# EAGLE board LurkerNanov10 (EAGLE 6.4)
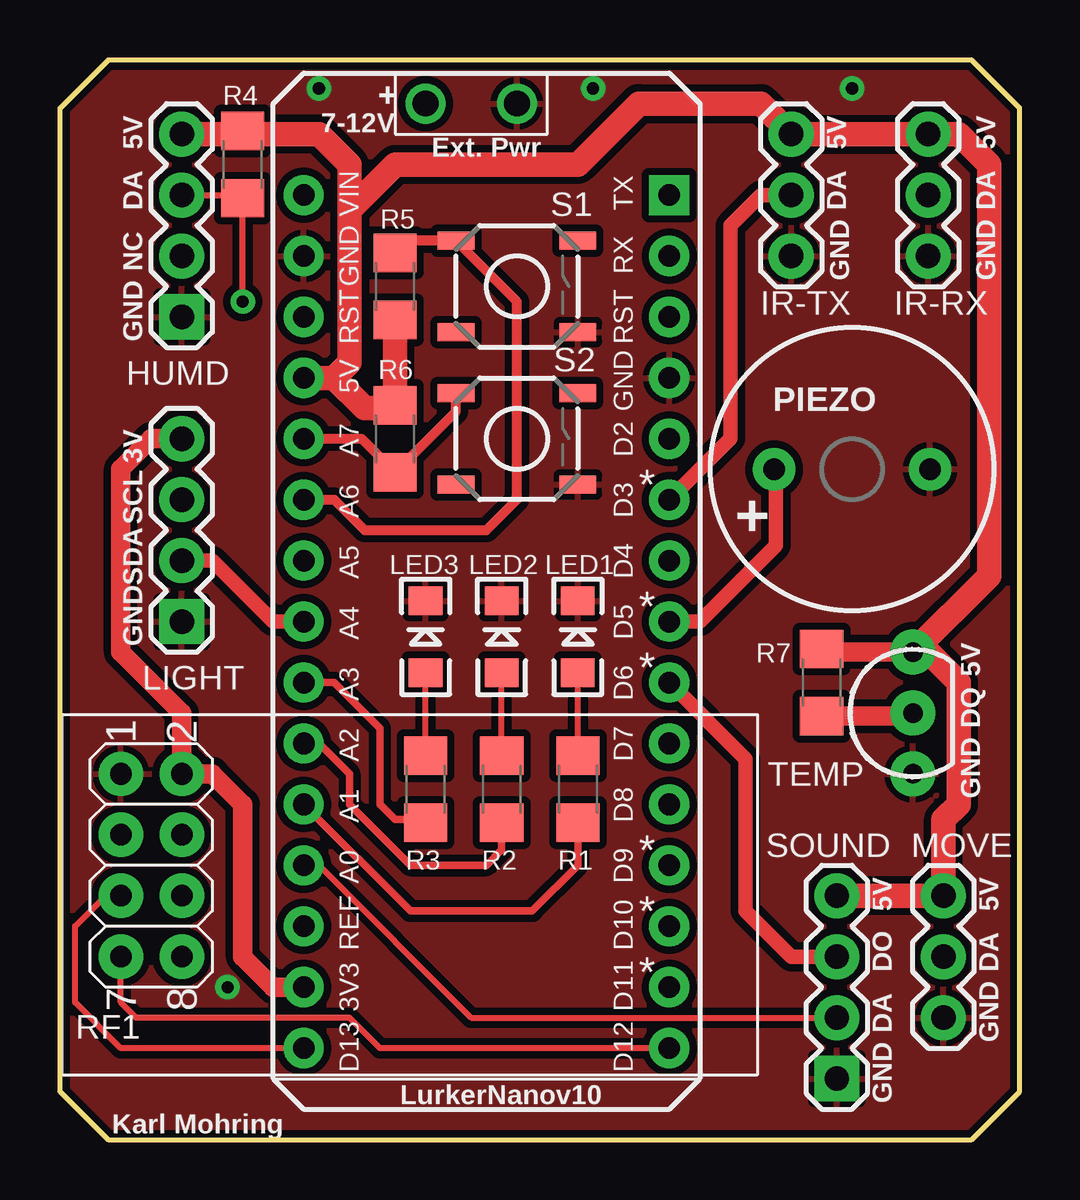
[diagram p0: board, top side]
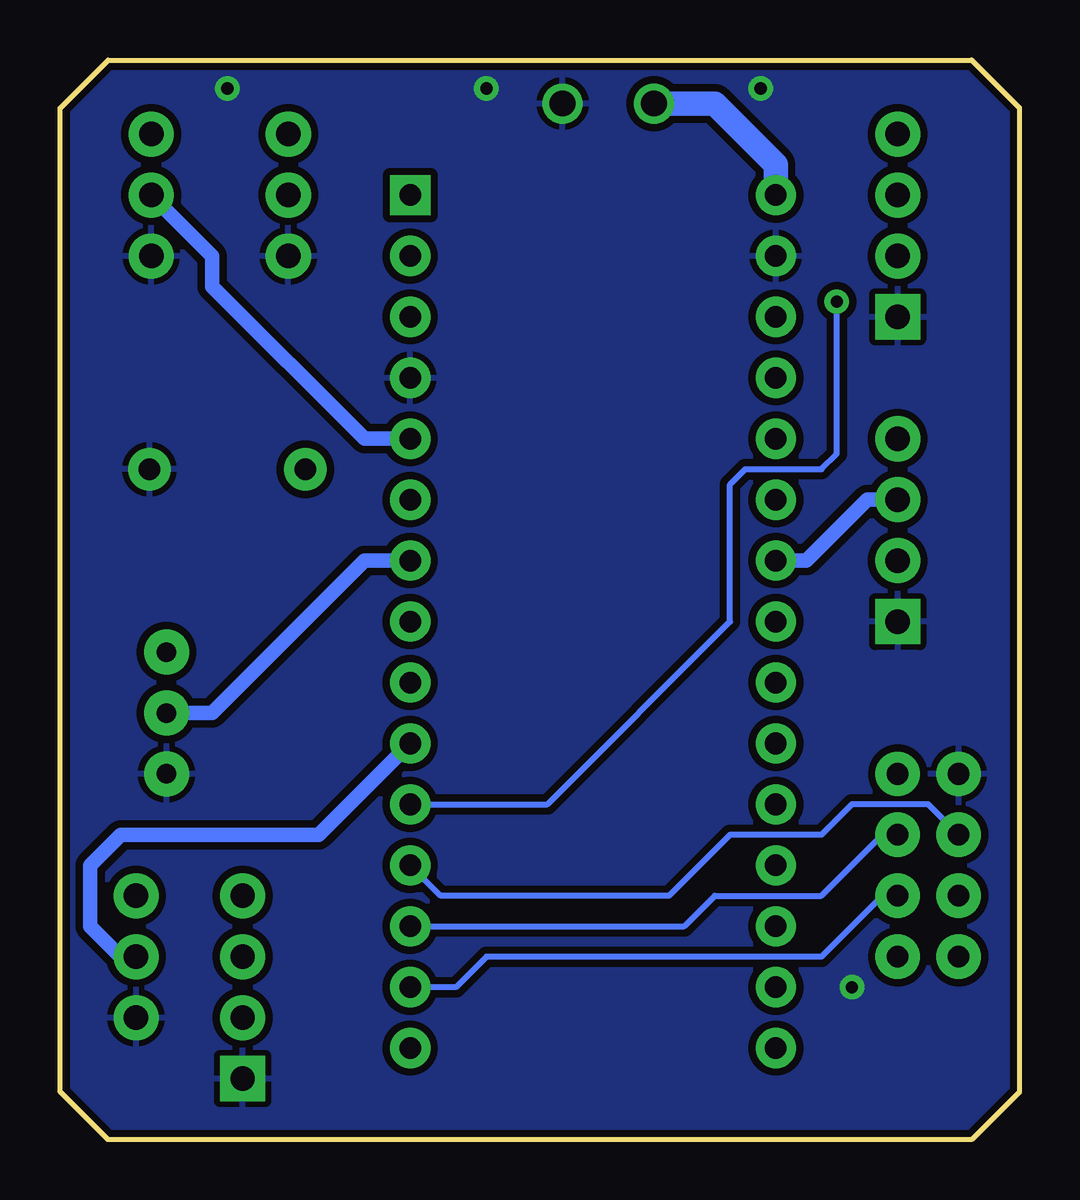
[diagram p1: board, bottom side, seen from below]

Size 40 x 45 mm. Coordinates in mm from the lower left corner, seen from the top.
Outline: 2,0 38,0 40,2 40,43 38,45 2,45 0,43 0,2 2,0
Copper layers (1*16): Top 0.035mm / dielectric 1.5mm / Bottom 0.035mm
Design rules "SparkFun": minimum track width 8mil, minimum drill 20mil, track to track 8mil, track to pad 8mil, pad to pad 8mil, via to via 8mil, smd to smd 8mil, copper to edge 10mil, drill to drill 8mil, minimum pad ring 12mil, minimum via ring 10mil, stop-mask expansion 4mil, vias tented up to drill 25mil, thermal gap 10mil

## Footprints (pad centres in the part's own frame; a part is rotated, then mirrored left to right if it is on the bottom)
1X02_BIG = drill 1.067: P$1 0,0; P$2 3.81,0
1X04 = drill 1.016 pad 1.88 square: 1 0,0 | drill 1.016 pad 1.88: 2 2.54,0; 3 5.08,0; 4 7.62,0
1X03 = drill 1.016 pad 1.88: 1 0,0; 2 2.54,0; 3 5.08,0
LED-1206 = smd 1.2 x 1.4: A -1.5,0; C 1.5,0
1206 = smd 1.6 x 1.8: 1 -1.4,0; 2 1.4,0
NRF24L01+-HEADER = drill 0.9 pad 1.85: 1 -2.54,-2.54; 2 -2.54,0; 3 0,-2.54; 4 0,0; 5 2.54,-2.54; 6 2.54,0; 7 5.08,-2.54; 8 5.08,0
TACTILE_SWITCH_SMD = smd 1.524 x 0.762: 1 -2.54,1.905; 2 2.54,1.905; 3 -2.54,-1.905; 4 2.54,-1.905
BUZZER-12MM = drill 0.9 pad 1.778: + 3.25,0; - -3.25,0
TO-92-AMMO = drill 0.813 pad 1.88: 1 -2.54,0; 2 0,0; 3 2.54,0
NANO-SHIELD = drill 0.9 pad 1.676: 3V3 0,2.54; 5V 0,27.94; A0 0,7.62; A1 0,10.16; A2 0,12.7; A3 0,15.24; A4 0,17.78; A5 0,20.32; A6 0,22.86; A7 0,25.4; D2 15.24,25.4; D3 15.24,22.86; D4 15.24,20.32; D5 15.24,17.78; D6 15.24,15.24; D7 15.24,12.7; D8 15.24,10.16; D9 15.24,7.62; D10 15.24,5.08; D11 15.24,2.54; D12 15.24,0; D13 0,0; GND@0 15.24,27.94; GND@1 0,33.02; REF 0,5.08; RST 0,30.48; RST@0 15.24,30.48; RX 15.24,33.02; VIN 0,35.56 | drill 0.9 pad 1.676 square: TX 15.24,35.56

## Placement (x,y rotation side)
BATTERY  [1X02_BIG]  19.05,43.18 180 top
HUMD  DHT22  [1X04]  5.08,34.29 90 top
IR-RX  [1X03]  36.2,36.83 90 top
IR-TX  [1X03]  30.48,36.83 90 top
LED1  [LED-1206]  21.59,20.95 90 top
LED2  [LED-1206]  18.41,20.95 90 top
LED3  [LED-1206]  15.24,20.95 90 top
LIGHT  BH1750FVI  [1X04]  5.08,21.59 90 top
MOVE  PIR (HC-SR501)  [1X03]  36.83,5.08 90 top
R1  390R  [1206]  21.59,14.61 90 top
R2  390R  [1206]  18.41,14.61 90 top
R3  390R  [1206]  15.24,14.61 90 top
R4  4K7  [1206]  7.62,40.64 90 top
R5  22K  [1206]  13.97,35.56 270 top
R6  22K  [1206]  13.97,29.21 90 top
R7  4K7  [1206]  31.75,19.05 90 top
RF1  NRF24L01+  [NRF24L01+-HEADER]  5.08,12.7 270 top
S1  TACT  [TACTILE_SWITCH_SMD]  19.05,35.56 0 top
S2  TACT  [TACTILE_SWITCH_SMD]  19.05,29.21 0 top
SG1  BUZZERPTH  [BUZZER-12MM]  33.02,27.94 0 top
SOUND  MIC  [1X04]  32.38,2.54 90 top
TEMP  DS18B20  [TO-92-AMMO]  35.56,17.78 90 top
U1  ARDUINO-NANO  [NANO-SHIELD]  10.16,3.81 0 top

## Library data of the parts
BATTERY HUMD IR-RX IR-TX LIGHT MOVE SOUND = SparkFun-Connectors
LED1-LED3 = SparkFun-LED
R1-R7 = SparkFun-Resistors
RF1 TEMP U1 = Leenix
S1 S2 = SparkFun-Electromechanical; PROD_ID: SWCH-08247
SG1 = SparkFun-Electromechanical

## Nets
+3V3: LIGHT.4 RF1.2 U1.3V3
+5V: HUMD.4 IR-RX.3 IR-TX.3 MOVE.3 R4.2 R5.2 R6.2 R7.2 SOUND.4 TEMP.3 U1.5V
BTN1: R5.1 S1.1 U1.A6
BTN2: R6.1 S2.1 U1.A7
BUZZER: SG1.- U1.D5
CE: RF1.3 U1.D9
CSN: RF1.4 U1.D10
GND: BATTERY.P$1 HUMD.1 IR-RX.1 IR-TX.1 LED1.C LED2.C LED3.C LIGHT.1 MOVE.1 RF1.1 S1.4 S2.4 SG1.+ SOUND.1 TEMP.1 U1.GND@0 U1.GND@1
HUMD-DQ: HUMD.3 R4.1 U1.D8
IR-RECV: IR-RX.2 U1.D2
IR-SEND: IR-TX.2 U1.D3
LED1: R1.1 U1.A1
LED2: R2.1 U1.A2
LED3: R3.1 U1.A3
MIC-AO: SOUND.2 U1.A0
MIC-DO: SOUND.3 U1.D6
MISO: RF1.7 U1.D12
MOSI: RF1.6 U1.D11
N$1: LED1.A R1.2
N$2: LED2.A R2.2
N$3: LED3.A R3.2
PIR: MOVE.2 U1.D7
SCK: RF1.5 U1.D13
SCL: LIGHT.3 U1.A5
SDA: LIGHT.2 U1.A4
TEMP-DQ: R7.1 TEMP.2 U1.D4
V+: BATTERY.P$2 U1.VIN

## Tracks (layer width: path | path; a pad name or v marks a point on that pad's centre or on a via)
+3V3
  Top 0.813: U1.3V3 8.89,6.35 7.62,7.62 7.62,13.97 6.35,15.24 RF1.2 5.08,17.78 2.54,20.32 2.54,27.94 3.81,29.21 LIGHT.4
+5V
  Top 0.61: 6.48,41.91 R4.2 6.22,41.91
  Top 0.813: TEMP.3 31.88,20.32 R7.2
  Top 1.016: 6.48,41.91 10.79,41.91 12.06,40.64 12.06,38.73 | HUMD.4 6.22,41.91 | SOUND.4 MOVE.3 36.83,13.34 37.47,13.97 37.47,19.05 36.2,20.32 TEMP.3 38.73,23.5 38.73,40.64 37.47,41.91 IR-RX.3 IR-TX.3 29.21,43.18 24.13,43.18 21.59,40.64 13.97,40.64 12.06,38.73 | U1.5V 11.43,31.75 | 11.43,31.75 12.7,30.48 13.84,30.48 R6.2 R5.2 | 12.06,38.73 12.06,32.38 11.43,31.75
BTN1
  Top 0.406: R5.1 14.47,37.47 S1.1 19.05,34.92 19.05,26.67 17.78,25.4 12.7,25.4 11.43,26.67 U1.A6
BTN2
  Top 0.406: U1.A7 12.57,29.21 R6.1 16.51,30.35 S2.1
BUZZER
  Top 0.61: U1.D5 26.67,21.59 29.84,24.77 29.84,27.86 SG1.-
CE
  Bottom 0.254: RF1.3 3.81,13.97 6.99,13.97 8.26,12.7 12.06,12.7 14.61,10.16 24.13,10.16 U1.D9
CSN
  Bottom 0.254: U1.D10 13.97,8.89 12.7,10.16 8.26,10.16 5.71,12.7 RF1.4
GND  (via drill 0.51)
  other vias: 33.02,43.81 10.79,43.81 22.23,43.81 6.99,6.35
  pour Top (isolate 0.305): 0,0 0,43.18 1.91,45.09 40.64,45.09 40.64,2.54 38.1,0
  pour Bottom (isolate 0.305): 40.64,0 40.64,42.55 38.1,45.09 -0.64,45.09 -0.64,2.54 1.91,0
HUMD-DQ  (via drill 0.51)
  Top 0.254: 6.99,38.6 R4.1 | HUMD.3 7.49,39.37 R4.1 | v7.62,34.92 R4.1
  Bottom 0.254: U1.D8 19.68,13.97 12.06,21.59 12.06,27.3 11.43,27.94 8.26,27.94 7.62,28.57 v7.62,34.92
IR-RECV
  Bottom 0.61: U1.D2 27.3,29.21 33.66,35.56 33.66,36.83 IR-RX.2
IR-SEND
  Top 0.61: IR-TX.2 29.21,39.37 27.94,38.1 27.94,29.21 U1.D3
LED1
  Top 0.305: U1.A1 14.61,9.53 19.68,9.53 21.59,11.43 R1.1
LED2
  Top 0.305: U1.A2 10.79,16.51 12.06,15.24 12.06,13.97 14.61,11.43 17.78,11.43 18.41,12.06 R2.1
LED3
  Top 0.305: U1.A3 11.43,19.05 13.34,17.14 13.34,13.97 13.97,13.34 15.11,13.34 R3.1
MIC-AO
  Top 0.254: U1.A0 10.79,11.43 17.14,5.08 SOUND.2
MIC-DO
  Top 0.61: SOUND.3 30.48,7.62 28.57,9.53 28.57,15.88 U1.D6
MISO
  Top 0.254: U1.D12 13.34,3.81 12.06,5.08 3.17,5.08 2.54,5.71 RF1.7
MOSI
  Bottom 0.254: RF1.6 5.71,10.16 8.26,7.62 22.23,7.62 23.5,6.35 U1.D11
N$1
  Top 0.254: R1.2 LED1.A
N$2
  Top 0.254: R2.2 LED2.A
N$3
  Top 0.254: R3.2 LED3.A
PIR
  Bottom 0.61: U1.D7 29.21,12.7 37.47,12.7 38.73,11.43 38.73,8.89 37.47,7.62 MOVE.2
SCK
  Top 0.254: U1.D13 2.54,3.81 0.64,5.71 0.64,8.89 1.91,10.16 RF1.5
SCL
  Bottom 0.61: LIGHT.3 6.35,26.67 8.89,24.13 U1.A5
SDA
  Top 0.61: U1.A4 8.89,21.59 6.35,24.13 LIGHT.2
TEMP-DQ
  Top 0.813: R7.1 35.43,17.65 TEMP.2
  Bottom 0.61: U1.D4 27.3,24.13 33.66,17.78 TEMP.2
V+
  Bottom 1.016: U1.VIN 10.16,40.64 12.7,43.18 BATTERY.P$2

## Text on the board
tPlace: + | 7-12V | Ext. Pwr | 5V | 5V | 5V | DA | DA | DA | NC | GND | GND | GND | PIEZO | 3V | + | SCL | SDA | GND | 5V | DQ | GND | 5V | 5V | DO | DA | DA | GND | GND | Karl Mohring